# Altium PCB H18-002.pcbdoc
Units mm, origin at the board's own origin, x right, y up, seen from the top; angles counter-clockwise.
Board outline 36.9 x 34 mm, 4 copper layers (Top Layer, P1, L2, Bottom Layer), stack 0.704 mm thick; 110 components, 63 nets, 277 pads, 64 vias.
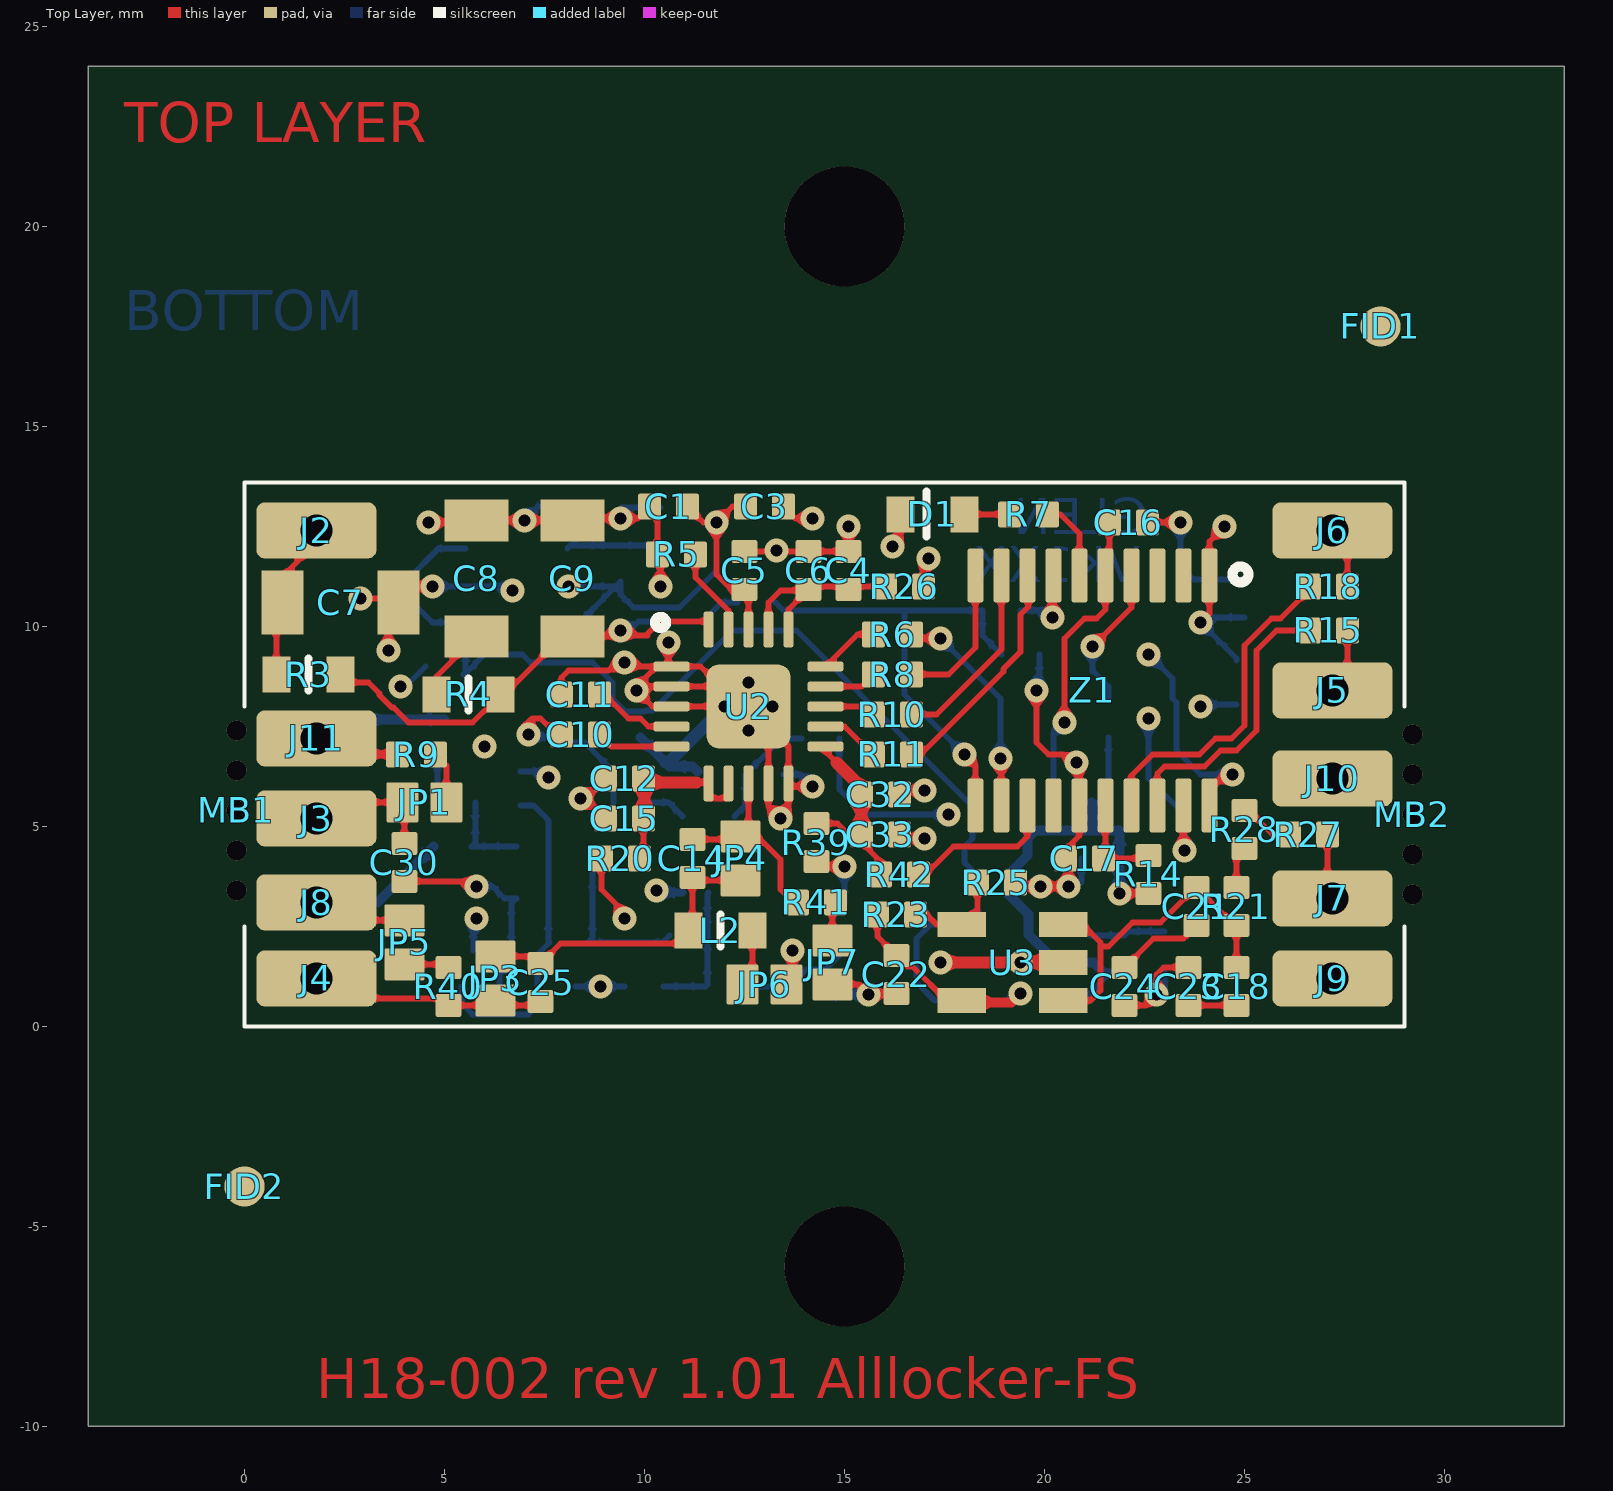
[diagram p0: Top Layer view]
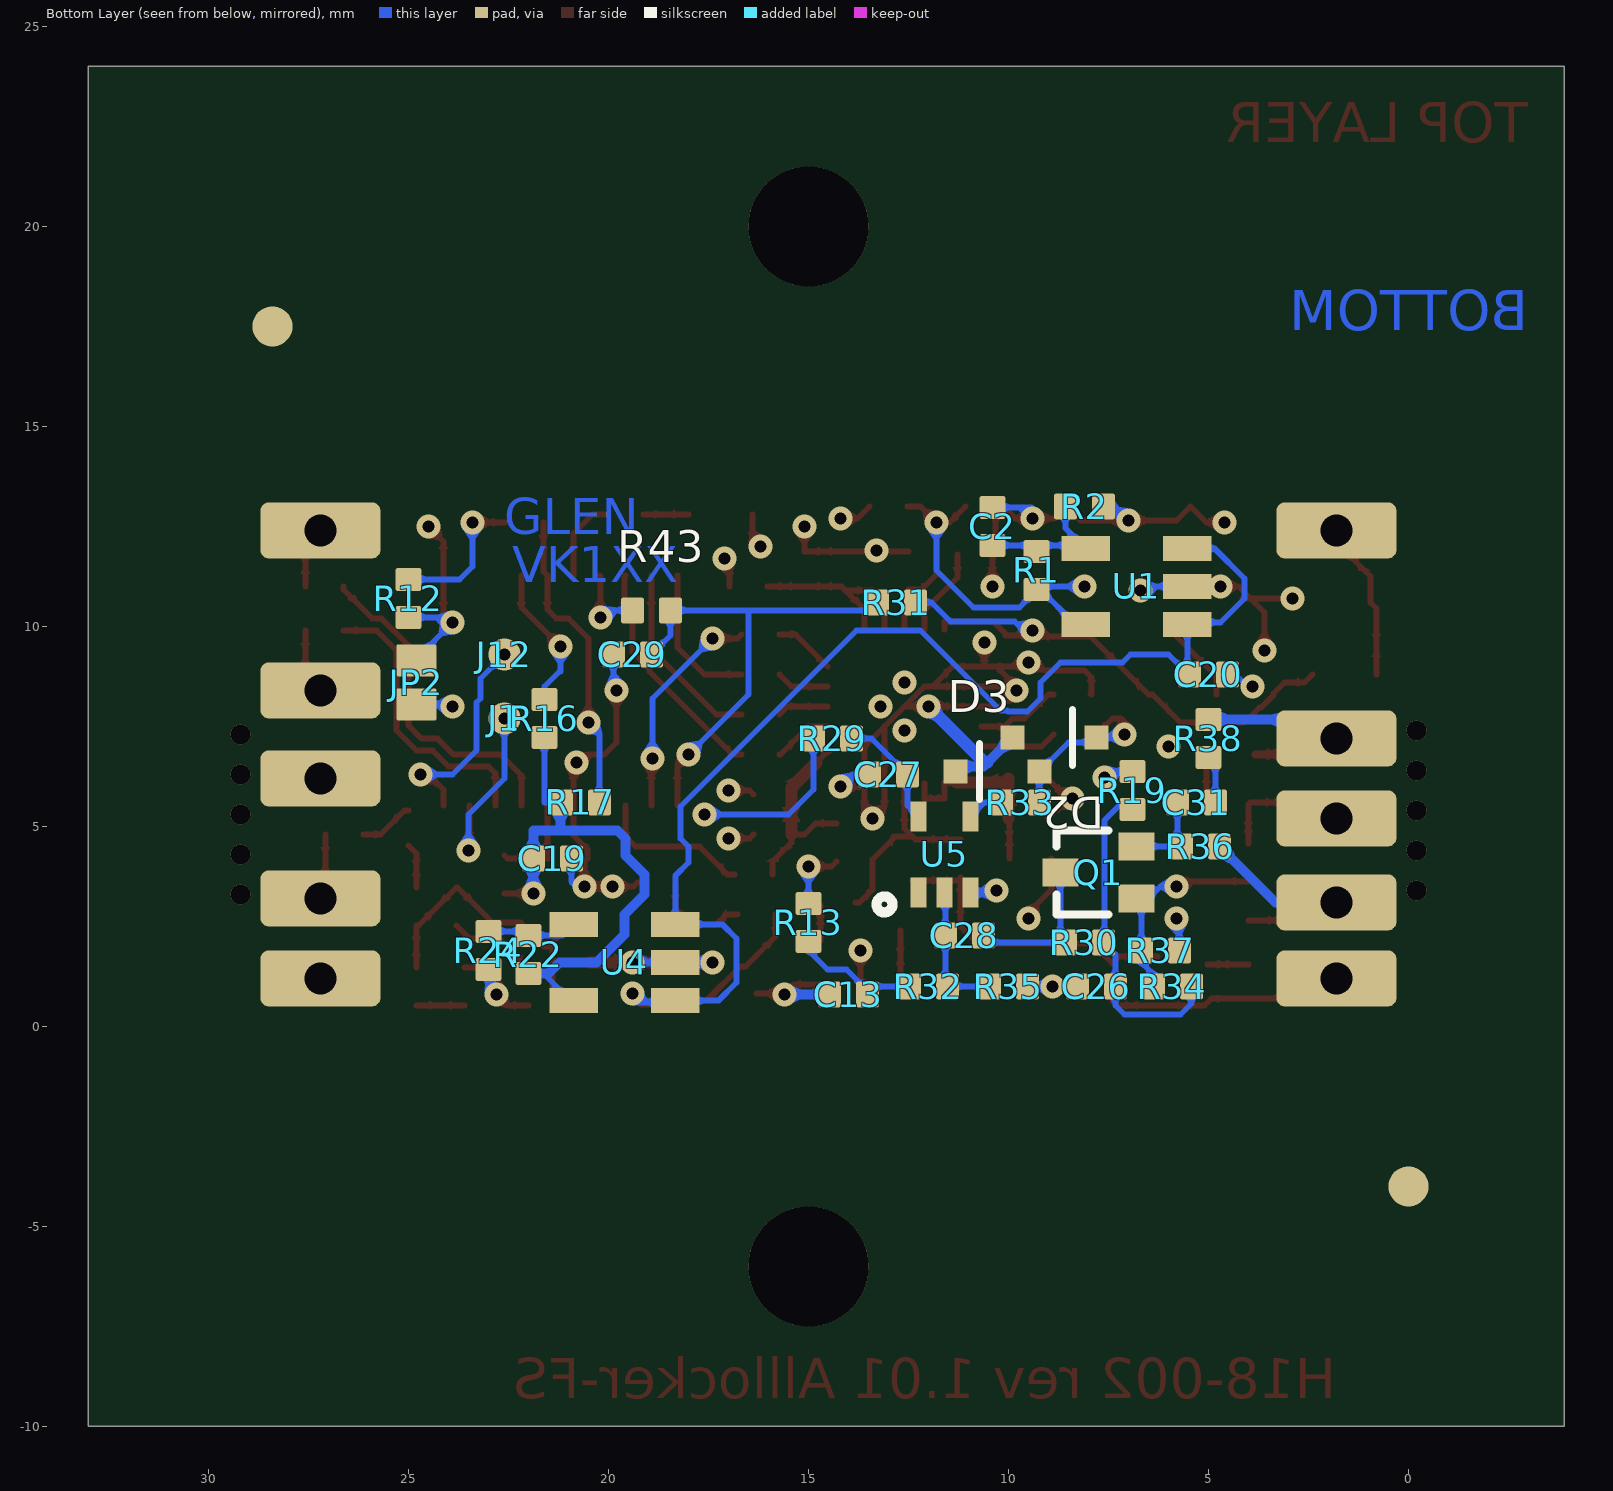
[diagram p1: Bottom Layer view, seen from below]
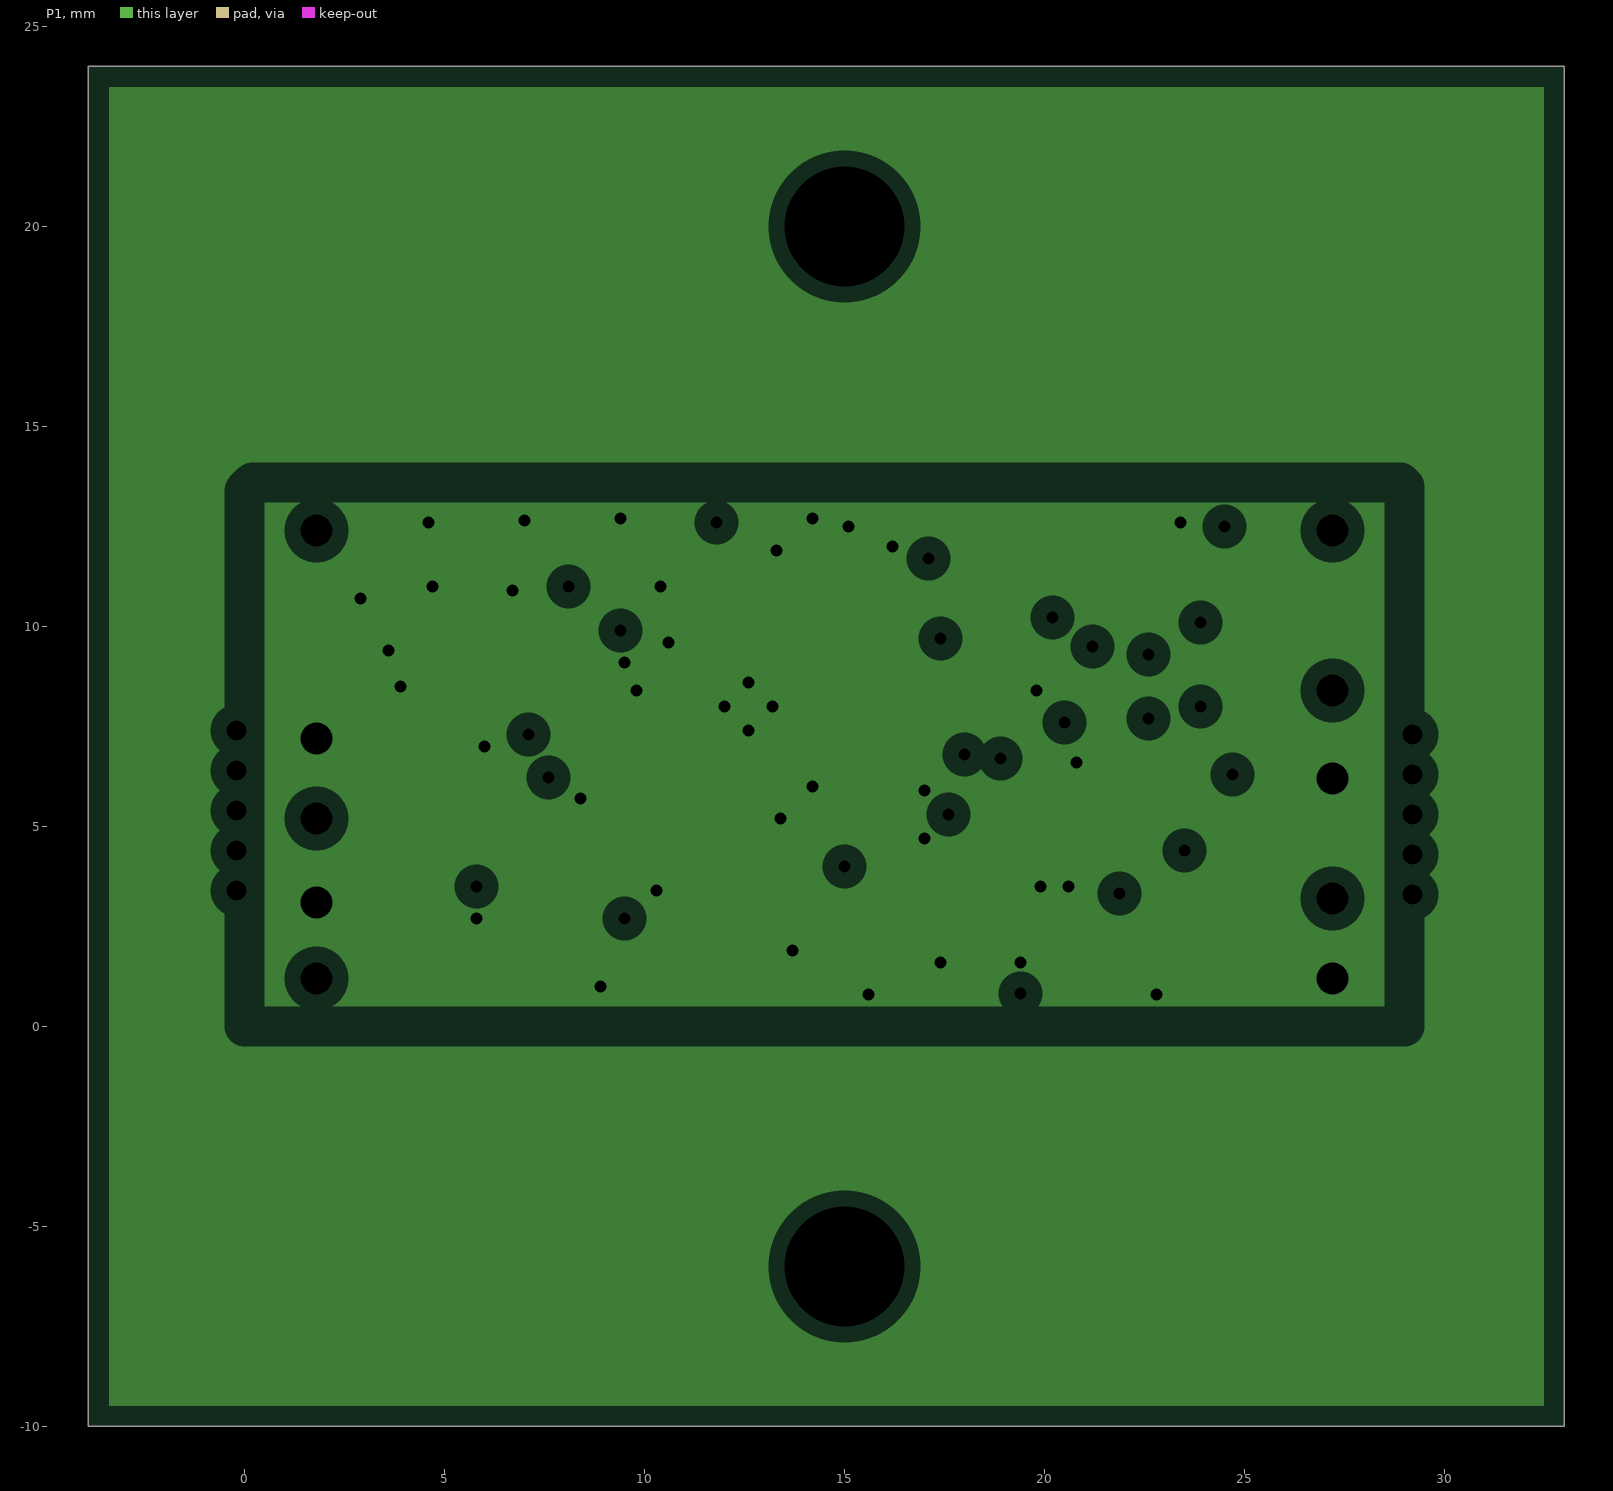
[diagram p2: P1, clearances drawn from the general rule]
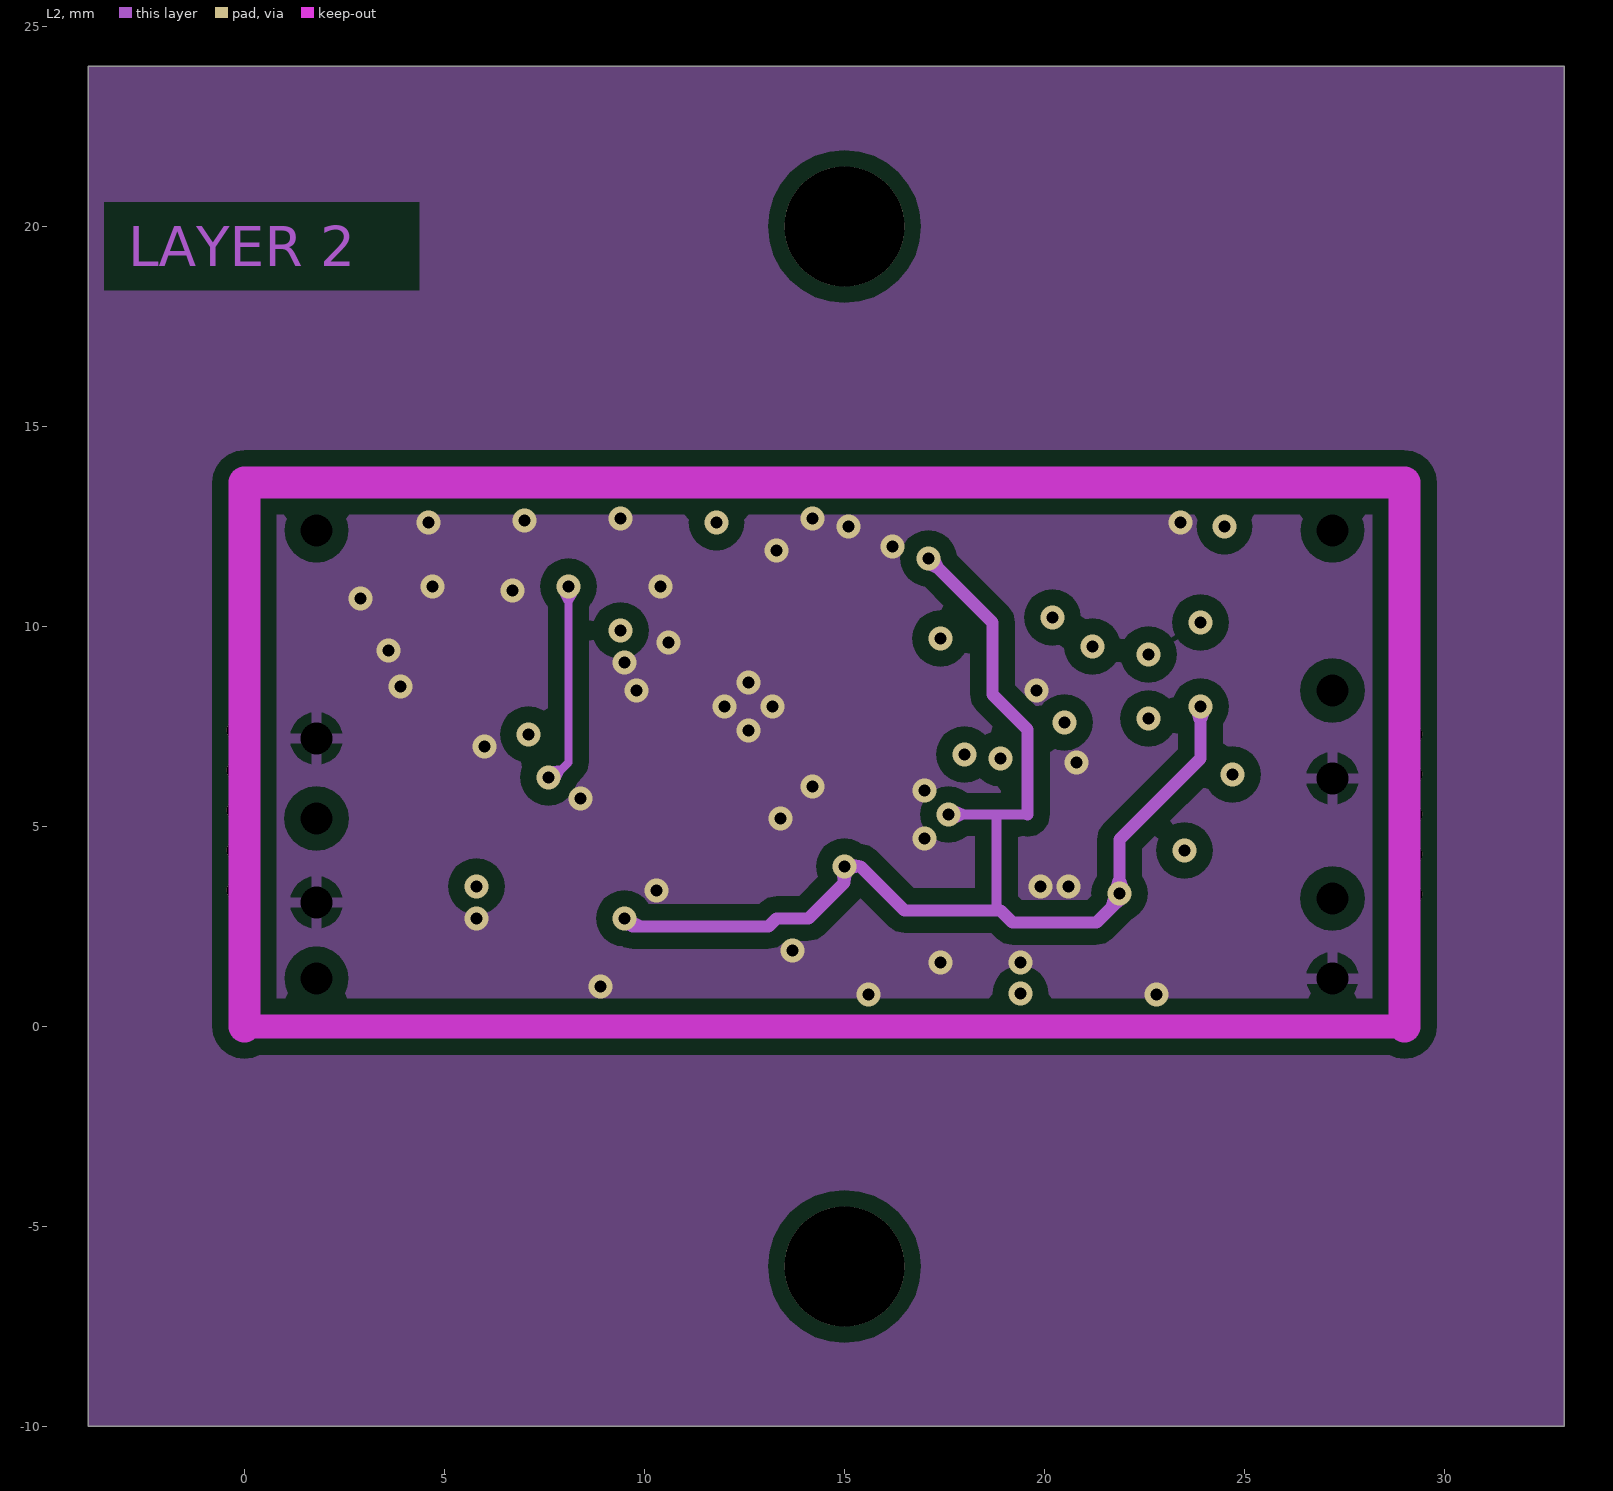
[diagram p3: L2]

## Layer stack, top to bottom
Top Solder: solder mask 0.0102, Solder Resist, Dk 3.5
Top Layer: signal copper 0.0356
Dielectric 1: core 0.18, FR-4, Dk 4.2
P1: plane copper 0.036, net GND
Dielectric 3: core 0.254, Dk 4.2
L2: signal copper 0.036
Dielectric 4: prepreg 0.127, Dk 4.2
Bottom Layer: signal copper 0.0356
Bottom Solder: solder mask 0.0102, Solder Resist, Dk 3.5

## Board outline
-3.9,-10 33,-10 33,24 -3.9,24

## Design rules (kind name [scope] priority, off if disabled: settings)
Clearance "Clearance Layer 2" [OnLayer('L2') vs HasFootprint('mousebite')] p1: gap=0 ignorepadtopadclearanceinfootprint=FALSE
Clearance "in poly" [InPolygon] p2: gap=0.4 ignorepadtopadclearanceinfootprint=FALSE
Clearance Clearance_1 [not InPolygon] p3: gap=0.15 ignorepadtopadclearanceinfootprint=FALSE except(0: Arc-Hole Track-Hole SMDPad-Hole THPad-Hole Via-Hole Fill-Hole Poly-Hole Region-Hole Text-Hole)
ComponentClearance [All] p1 off: gap=0.254 collisioncheckmode=3 verticalgap=0.254 showdistances=FALSE
DiffPairsRouting [All] p1: maxlimit=10 minlimit=0.2 mostfreqgap=0.2 toplayer_mingap=0.2 toplayer_minwidth=0.15 toplayer_maxwidth=0.2 toplayer_prefwidth=0.2 midlayer1_maxgap=0.2 midlayer1_minwidth=0.381 midlayer1_maxwidth=0.381 midlayer1_prefwidth=0.381 bottomlayer_mingap=0.2 bottomlayer_prefgap=0.2 bottomlayer_minwidth=0.15 bottomlayer_maxwidth=0.2 bottomlayer_prefwidth=0.2 maxuncoupledlength=100
Height [All] p1 off: minheight=0 maxheight=25.4 prefheight=12.7
HoleSize [All] p1: absolutevalues=TRUE maxlimit=5 minlimit=0.2 maxpercent=80.000 minpercent=20.000
MinimumAnnularRing [All] p1: minimumring=0.1
MinimumSolderMaskSliver SilkscreenOverComponentPads [All] p2: minsoldermaskwidth=0.254
PlaneClearance PlaneClearance_1 [All] p1: clearance=0.4
PlaneConnect PlaneConnectVia [IsVia] p1: planeconnectstyle=Direct reliefexpansion=0.508 reliefentries=4 reliefconductorwidth=0.254 reliefairgap=0.254
PlaneConnect PlaneConnectPin [IsComponentVia Or IsComponentPad] p2: planeconnectstyle=Relief reliefexpansion=0.508 reliefentries=4 reliefconductorwidth=0.254 reliefairgap=0.254
PolygonConnect PolygonConnectPad [IsComponentPad] p1: connectstyle=Relief reliefconductorwidth=0.254 reliefentries=4 polygonreliefangle="90 Angle" airgapwidth=0.254
PolygonConnect PolygonConnectvIA [IsVia] p2: connectstyle=Direct reliefconductorwidth=0.254 reliefentries=4 polygonreliefangle="90 Angle" airgapwidth=0.254
RoomDefinition main [InComponentClass('main')] p1: confinementstyle=ConfineIn formatcopy=TRUE lockcomponents=FALSE outline -45,-70 5.8,-70 5.8,-44.6 -45,-44.6
RoutingVias [All] p1: holewidth=0.3 width=0.6 viastyle="Through Hole" minholewidth=0.3 minwidth=0.6 maxholewidth=10 maxwidth=20
SilkToSolderMaskClearance [IsPad] p1: minsilkscreentomaskgap=0.05 clearancetoexposedcopper=FALSE
SolderMaskExpansion [All] p1: expansion=0.07
Width [All] p1: maxlimit=10 minlimit=0.15 preferedwidth=0.25 toplayer_prefwidth=0.2 midlayer1_minwidth=0.2 bottomlayer_prefwidth=0.2 minimp=50.000000 maximp=50.000000 favimp=50.000000
23 further rules are at their usual default settings.

## Components (designator, comment, footprint, x,y, rotation, side; value= is the part's Value field where it differs from the comment)
C1 "1u 10V" 0402C 10.6,13 r180 top
C2 "100p" 0402C 10.4,12.5 r90 bottom
C3 "100n" 0402C 13,13 r0 top
C4 "100n" 0402C 15.1,11.4 r90 top
C5 "100p" 0402C 12.5,11.4 r90 top
C6 "100p" 0402C 14.1,11.4 r90 top
C7 "15n NPO" 1206C 2.4,10.6 r0 top
C8 "1u 10V" 1206C 5.8,11.2 r90 top
C9 "68n NPO" 1206C 8.2,11.2 r90 top
C10 "1n" 0402C 8.4,7.3 r0 top
C11 "1n" 0402C 8.4,8.3 r180 top
C12 "100p" 0402C 9.5,6.2 r0 top
C13 "10n" 0402C 14,0.8 r180 bottom
C14 "470p" 0402C 11.2,4.2 r90 top
C15 "100n" 0402C 9.5,5.2 r0 top
C16 "10n" 0402C 22.1,12.6 r0 top
C17 "10n" 0402C 21,4.2 r180 top
C18 "1u 10V" 0402C 24.8,1 r270 top
C19 "1u 10V" 0402C 21.4,4.2 r180 bottom
C20 "1u 10V" 0402C 5,8.8 r180 bottom
C21 "1u 10V" 0402C 23.8,3 r270 top
C22 "1u 10V" 0402C 16.3,1.3 r270 top
C23 "1u 10V" 0402C 23.6,1 r90 top
C24 "1u 10V" 0402C 22,1 r270 top
C25 "470p" 0402C 7.4,1.1 r90 top
C26 "100n" 0402C 7.8,1 r180 bottom
C27 "10n" 0402C 13,6.3 r0 bottom
C28 "1n" 0402C 11.1,2.275 r0 bottom
C29 "10n" 0402C 19.4,9.3 r0 bottom
C30 "100p" 0402C 4,4.1 r270 top
C31 "1n" 0402C 5.3,5.6 r0 bottom
C32 "100p" 0402C 15.9,5.8 r0 top
C33 "100n" 0402C 15.9,4.8 r0 top
D1 "red" 0603LED 17.2,12.8 r180 top
D2 "1SS356" SOD323 9.9,7.225 r0 bottom
D3 "1SS356" SOD323 9.225,6.375 r180 bottom
FID1 "FIDUCIAL" FIDUCIAL 28.4,17.5 r0 top
FID2 "FIDUCIAL" FIDUCIAL 0,-4 r0 top
J1 "SWD" TESTPOINT_SMALL 22.6,7.7 r180 bottom
J2 "CTL" GPPAD3R#1 1.8,12.3 r0 top
J3 "RFIN" GPPAD3R#2 1.8,5.2 r0 top
J4 "PAD" GPPAD3R#2 1.8,1.2 r0 top
J5 "USBDP" GPPAD3R#2 27.2,8.4 r0 top
J6 "USBDM" GPPAD3R#3 27.2,12.5 r0 top
J7 "INV" GPPAD3R#2 27.2,3.2 r0 top
J8 "GND" GPPAD3R#2 1.8,3.1 r0 top
J9 "GND" GPPAD3R#2 27.2,1.2 r0 top
J10 "GND" GPPAD3R#2 27.2,6.2 r0 top
J11 "GND" GPPAD3R#2 1.8,7.2 r0 top
J12 "SWC" TESTPOINT_SMALL 22.6,9.3 r180 bottom
JP1 "blob" BLOBJUMPER#1 4.5,5.6 r0 top
JP2 "blob" BLOBJUMPER#2 24.8,8.6 r90 bottom
JP3 "blob" BLOBJUMPER#1 6.275,1.2 r90 top
JP4 "blob" BLOBJUMPER#1 12.4,4.2 r270 top
JP5 "blob" BLOBJUMPER#1 4,2.1 r90 top
JP6 "blob" BLOBJUMPER#1 13,1.05 r0 top
JP7 "blob" BLOBJUMPER#1 14.7,1.6 r270 top
L2 "820n" 0603L 11.9,2.4 r180 top
MB1 "mousebite" mousebite -0.2,5.4 r90 top
MB2 "mousebite" mousebite 29.2,5.3 r90 top
Q1 "NPN1-SOT-23" SOT-323 6.8,3.2 r90 bottom
R1 "150k" 0402R 9.3,11.4 r270 bottom
R2 "47k" 0402R 8.1,13 r180 bottom
R3 "10k" 0603R 1.6,8.8 r180 top
R4 "47k" 0603R 5.6,8.3 r180 top
R5 "5k1" 0402R 10.8,11.8 r180 top
R6 "51" 0402R 16.2,9.8 r180 top
R7 "1k" 0402R 19.6,12.8 r0 top
R8 "1k" 0402R 16.2,8.8 r180 top
R9 "51" 0402R 4.3,6.8 r180 top
R10 "1k" 0402R 16.2,7.8 r180 top
R11 "1k" 0402R 16.2,6.8 r180 top
R12 "4k7" 0402R 25,10.7 r90 bottom
R13 "51" 0402R 15,2.6 r270 bottom
R14 "10" 0402R 22.6,3.8 r90 top
R15 "22" 0402R 27.1,9.9 r180 top
R16 "47k" 0402R 21.6,7.7 r90 bottom
R17 "10" 0402R 20.7,5.6 r180 bottom
R18 "22" 0402R 27.1,11 r180 top
R19 "51" 0402R 6.9,5.9 r270 bottom
R20 "10" 0402R 9.4,4.2 r0 top
R21 "51" 0402R 24.8,3 r90 top
R22 "62k" 0402R 22,1.8 r270 bottom
R23 "220k" 0402R 16.3,2.8 r180 top
R24 "47k" 0402R 23,1.9 r270 bottom
R25 "47k" 0402R 18.8,3.6 r0 top
R26 "10" 0402R 16.5,11 r180 top
R27 "51" 0402R 26.6,4.8 r0 top
R28 "51" 0402R 25,4.925 r90 top
R29 "51" 0402R 14.4,7.2 r180 bottom
R30 "470" 0402R 8.1,2.1 r180 bottom
R31 "47k" 0402R 12.8,10.6 r180 bottom
R32 "22k" 0402R 12,1 r180 bottom
R33 "220" 0402R 9.7,5.6 r180 bottom
R34 "47k" 0402R 5.9,1 r180 bottom
R35 "22k" 0402R 10,1 r180 bottom
R36 "270" 0402R 5.2,4.5 r0 bottom
R37 "22k" 0402R 6.2,1.9 r180 bottom
R38 "10" 0402R 5,7.2 r90 bottom
R39 "10" 0402R 14.3,4.6 r90 top
R40 "51" 0402R 5.1,1 r90 top
R41 "470" 0402R 14.3,3.1 r0 top
R42 "1k" 0402R 16.375,3.8 r180 top
R43 "10k" 0402R 18.925,10.4 r180 bottom
U1 "MIC5207BM5" SOT23-5 6.8,11 r270 bottom
U2 "ADF4153ALFSCP" ADI-CP-20-6 12.6,8 r0 top locked
U3 "MIC5207BM5" SOT23-5 19.2,1.6 r270 top
U4 "MIC5207BM5" SOT23-5 19.6,1.6 r270 bottom
U5 "7SZ14" SC70-5 11.6,4.3 r90 bottom
Z1 "STM32F042F4P6" TSSOP20_4.4MM 21.2,8.4 r270 top locked

## Footprints (in the part's own frame and the unit in brackets; to place one, negate y for a bottom-side part, rotate by r counter-clockwise, add the part's x,y. Pads: shape width x height; smd on the part's side, far side on the other; paste and mask are expansions set on the pad)
0402C [mm]
  rrect20% 0.575x0.65 smd: 1(-0.475,0) 2(0.475,0)
  body extent -0.53,-0.28 0.53,0.28, height 0.5
0402R [mm]
  rrect20% 0.575x0.65 smd: 1(-0.475,0) 2(0.475,0)
  body extent -0.53,-0.28 0.53,0.28, height 0.5
0603L [mm] "0603 inductor"
  rect 0.7x0.9 smd: 1(-0.8,0) 2(0.8,0)
  silkscreen extent 0,-0.4 0,0.4, body extent -0.85,-0.45 0.85,0.45, height 1
0603LED [mm]
  rect 0.7x0.9 smd: A(-0.8,0) K(0.8,0)
  silkscreen extent 0.15,-0.58 0.15,0.55, body extent -0.9,-0.45 0.9,0.45, height 0.6
0603R [mm] "0603resistor"
  rect 0.7x0.9 smd: 1(-0.8,0) 2(0.8,0)
  silkscreen extent 0,-0.4 0,0.4, body extent -0.85,-0.45 0.85,0.45, height 1
1206C [mm]
  rect 1.05x1.6 smd: 1(-1.45,0) 2(1.45,0)
  body extent -1.6,-0.8 1.6,0.8, height 0.55
ADI-CP-20-6 [mm] "adi lfcsp"
  rrect30% 2.1x2.1 smd paste-1 mask+0.07: 0(0,0)
  rrect50% 0.9x0.25 smd mask+0.07: 1(-1.925,1) 2(-1.925,0.5) 3(-1.925,0) 4(-1.925,-0.5) 5(-1.925,-1) 11(1.925,-1) 12(1.925,-0.5) 13(1.925,0) 14(1.925,0.5) 15(1.925,1)
  rrect50% 0.25x0.9 smd mask+0.07: 6(-1,-1.925) 7(-0.5,-1.925) 8(0,-1.925) 9(0.5,-1.925) 10(1,-1.925) 16(1,1.925) 17(0.5,1.925) 18(0,1.925) 19(-0.5,1.925) 20(-1,1.925)
  rrect30% 0.8x0.8 on Top Paste: ""(-0.5,-0.5) ""(-0.5,0.5) ""(0.5,-0.5) ""(0.5,0.5)
  silkscreen extent -2.34,1.96 -2.06,2.24, body extent -2,-2 2,2, height 0.8
BLOBJUMPER#1 [mm] "blob  jumper"
  rrect10% 0.8x1 smd paste-0.5: 1(-0.55,0) 2(0.55,0)
  oct 0.8x1 on Top Solder paste-1 mask-1: 3(0,0)
BLOBJUMPER#2 [mm] "blob  jumper"
  rrect10% 0.8x1 smd paste-0.5: 1(-0.55,0) 2(0.55,0)
  oct 0.8x1 on Bottom Solder paste-1 mask-1: 3(0,0)
FIDUCIAL [mm] "PCB Fiducial marker"
  round 1 smd far side paste-1 mask+1: 0(0,0)
  round 1 smd paste-1 mask+1: 1(0,0)
GPPAD3R#1 [mm] "smaller GPpad"
  rrect30% 3x1.4 / inner rrect30% 0x0 / far side rrect30% 3x1.4 hole 0.8 paste-1 mask+0: 1(0,0.1)
GPPAD3R#2 [mm] "smaller GPpad"
  rrect30% 3x1.4 / inner rrect30% 0x0 / far side rrect30% 3x1.4 hole 0.8 paste-1 mask+0: 1(0,0)
GPPAD3R#3 [mm] "smaller GPpad"
  rrect30% 3x1.4 / inner rrect30% 0x0 / far side rrect30% 3x1.4 hole 0.8 paste-1 mask+0: 1(0,-0.1)
mousebite [mm] "mousebite"
  round 0.5 hole 0.5 unplated: ""(-2,0) ""(-1,0) ""(0,0) ""(1,0) ""(2,0)
SC70-5 [mm]
  rect 0.75x0.4 smd: 1(-0.955,0.65) 2(-0.955,0) 3(-0.955,-0.65) 4(0.955,-0.65) 5(0.955,0.65)
  silkscreen extent -1.45,1.3 -1.05,1.7, body extent -0.71,-1.1 0.79,1.1, height 1
SOD323 [mm] "SOD323 diode"
  rect 0.6x0.6 smd: A(0,0) K(-2.1,0)
  silkscreen extent -1.5,-0.7 -1.5,0.7
SOT23-5 [mm]
  rect 0.62x1.22 smd: 1(0.953,1.27) 2(0,1.27) 3(-0.952,1.27) 4(-0.953,-1.27) 5(0.952,-1.27)
  body extent -1.25,-0.88 1.25,0.87, height 1.5
SOT-323 [mm]
  rect 0.7x0.9 smd: 1(0,0) 2(1.3,0) 3(0.65,1.9)
  silkscreen extent -0.4,0.7 1.7,2
TESTPOINT_SMALL [mm] "small tp"
  round 0.8 smd paste-0.5: 1(0,0)
TSSOP20_4.4MM [mm] "TSSOP20 4.4mm"
  rrect30% 1.35x0.4 smd mask+0.07: 1(-2.875,2.925) 2(-2.875,2.275) 3(-2.875,1.625) 4(-2.875,0.975) 5(-2.875,0.325) 6(-2.875,-0.325) 7(-2.875,-0.975) 8(-2.875,-1.625) 9(-2.875,-2.275) 10(-2.875,-2.925) 11(2.875,-2.925) 12(2.875,-2.275) 13(2.875,-1.625) 14(2.875,-0.975) 15(2.875,-0.325) 16(2.875,0.325) 17(2.875,0.975) 18(2.875,1.625) 19(2.875,2.275) 20(2.875,2.925)
  silkscreen extent -3.1,3.5 -2.7,3.9, body extent -2.2,-3.4 2.2,3.4, height 1

## Part data
C1 C2 C3 C4 C5 C6 C7 C8 C9 C10 C11 C12 C14 C15 C18 C19 C20 C21 C22 C23 C24 C25 C28 C29 C30 C31 C32 C33: library part caps
C13 C16 C17 C26 C27: library part casp
D1: library part LEDS
D2 D3: library part DIODE-AKPINS_SMALL, "diode small"
FID1 FID2: "fiducial mark"
J1 J2 J3 J4 J5 J6 J7 J8 J9 J10 J11 J12: library part TESTPOINT, "test point"
JP1 JP2 JP3 JP4 JP5 JP6 JP7: library part BLOBJUMPER, "blob jumper"
L2: library part INDSMALL, "inductor small"
R1 R2 R3 R4 R5 R6 R7 R8 R9 R10 R11 R12 R13 R14 R15 R16 R17 R18 R19 R20 R21 R22 R23 R24 R25 R26 R27 R28 R29 R30 R31 R32 R33 R34 R35 R36 R37 R38 R39 R40 R41 R42 R43: library part ress, "resistor small"
U1 U3 U4: "adjustable low dropout regulator"
U2: library part ADF4153LFSCP, "freq synthesiser"
U5: library part 7SZ04, "tinylogic unbuffer"
Z1: library part STM32F042x4, "STM32 M0 TSSOP"

## Free pads (board coordinates)
  round 3 hole 3 unplated: ""(15,-6) ""(15,20)

## Via types
v1: diameter 0.6, hole 0.3, Top Layer to Bottom Layer, tented both sides, 56 vias
v2: diameter 0.6, hole 0.3, Top Layer to Bottom Layer, 8 vias

## Nets (pads, with @x,y where several pads share a name; then routed paths per layer and width w, separated by ;. In a path a pad name is that pad's centre, name@x,y a point inside that pad or via, vN(x,y) a via of type N, cw(c..) or ccw(c..) an arc to the next point about the centre after c; other vN are vias at no path point)
7V: C20.1 C22.1 R23.2 U1.1 U1.3 U3.5 U4.1 U4.3 | length 35.5
  Top Layer w0.15: R23.2 15.825,2.25 C22.1 16.575,1.5 16.7,1.5 17.552,0.647 U3.5 U3.5@17.978,0.6
  Top Layer w0.25: U3.5@17.978,0.6 19.175,0.6 v1(19.4,0.825)
  Bottom Layer w0.15: U1.3 4.852,11.953 4.1,11.2 4.1,10.7 4.7,10.1 5.477,10.1 U1.1 ; U1.1@5.753,10.048 U1.1 ; v1@19.4,0.6 18.377,0.6 U4.1 17.253,0.647 16.8,1.1 16.8,2.2 17.152,2.552 U4.3 18.33,3.77 18,4.1 18,4.5 18.2,4.7 18.2,5.5 13.8,9.9 12.2,9.9 10.2,7.9 10.042,7.9 10.017,7.875 9.525,7.875 9.2,8.2 9.2,8.6 8.7,9.1 7.15,9.1 6.95,9.3 6,9.3 5.5,8.8 C20.1 5.53,8.855 U1.1
10M: C25.1 J4.1 JP3.1 R40.1 | length 5.8
  Top Layer w0.15: J4.1@1.8,1 2.1,0.7 4.925,0.7 R40.1 7.3,0.525 C25.1
AC: C29.1 R31.1 R43.2 Z1.11 | length 12.2
  Top Layer w0.15: v1(18,6.8) 18.275,6.525 Z1.11
  Bottom Layer w0.15: R31.1 13.475,10.4 16.5,10.4 ; v1(18,6.8) 16.5,8.3 16.5,10.4 ; C29.1 18.45,9.775 R43.2 16.5,10.4
CE: R42.1 Z1.13 | length 3.9
  Top Layer w0.15: R42.1 17.025,3.8 17.725,4.5 19.325,4.5 19.575,4.75 Z1.13
CK: R11.1 Z1.8 | length 5.8
  Top Layer w0.15: R11.1 16.9,6.8 18.975,8.875 18.975,8.942 19.4,9.366 19.4,10.3 19.6,10.5 19.6,11.25 Z1.8
CP: C9.1 R3.1 R4.1 R31.2 U2.20 | length 14.3
  Top Layer w0.15: R3.1 2.6,8.6 3.1,8.6 3.375,8.325 3.375,8.283 3.683,7.975 3.725,7.975 4.1,7.6 5.7,7.6 R4.1 6.5,8.3 7.95,9.75 C9.1 ; C9.1@8.225,9.775 C9.1 ; U2.20 11.6,10.125 10.383,10.125 10.075,9.817 10.075,9.775 9.525,9.775 v1(9.4,9.9) 9.25,9.75 C9.1
  Bottom Layer w0.15: v1(9.4,9.9) 9.625,9.9 9.85,10.125 11.45,10.125 11.925,10.6 R31.2
CTL: C7.1 J2.1 R3.2 | length 4.4
  Top Layer w0.15: R3.2 0.8,10.45 C7.1 0.95,11.25 2,12.3 2,12.4 J2.1@1.8,12.6
D: R10.1 Z1.9 | length 4.8
  Top Layer w0.15: R10.1 17.3,7.8 18.925,9.425 Z1.9
DC: C10.1 D2.K D3.A R33.2 | length 4.6
  Top Layer w0.15: v1(7.1,7.3) 7.1,7.6 7.2,7.7 7.4,7.7 7.8,7.3 C10.1
  Bottom Layer w0.15: v1(7.1,7.3) 7.175,7.225 D2.K 7.925,7.1 8.5,7.1 D3.A R33.2
DM: J6.1 R18.1 | length 1.7
  Top Layer w0.15: J6.1@27.2,12.5 27.575,12.125 R18.1
DP: J5.1 R15.1 | length 1.7
  Top Layer w0.15: J5.1 27.575,8.775 R15.1
GND: C1.2 C2.2 C3.2 C4.2 C5.2 C6.2 C7.2 C8.2 C9.2 C11.2 C12.1 C13.1 C15.1 C16.2 C17.2 C19.2 C20.2 C22.2 C23.2 C24.2 C26.1 C27.2 C29.2 C32.2 C33.2 D1.K D2.A D3.K J8.1 J9.1 J10.1 J11.1 JP5.2 JP6.2 JP7.2 R2.2 R5.2 R9.2 R12.2 R24.2 R25.2 R35.2 R36.1 R37.2 R38.2 U1.2 U2.0 U2.1 U2.2 U2.3 U2.9 U2.10 U3.2 U4.2 U5.3 Z1.15 | length 87
  Top Layer w0.15: J8.1 2.25,2.65 JP5.2 ; v1(2.9,10.7) C7.2@3.95,10.7 ; v1(3.6,9.4) 3.6,10.35 C7.2 C7.2@3.95,10.7 ; C7.2@4.15,10.7 C7.2@3.95,10.7 ; v1(4.6,12.6) 5.05,12.6 5.45,13 C8.2 v1(7,12.65) C9.2 8.55,13 8.85,12.7 v1(9.4,12.7) 9.825,12.7 C1.2 10.325,12.8 R5.2 10.4,11.725 v1(10.4,11) ; v1(4.7,11) 4.25,11 C7.2@3.95,10.7 ; v1(5.8,2.7) v1@5.825,2.725 ; C11.2@7.95,8.325 C11.2 7.925,8.725 8.1,8.9 9.1,8.9 9.3,9.1 v1(9.5,9.1) 9.6,9 U2.1@10.3,9 ; v1(8.4,5.7) v1@8.525,5.7 ; C15.1 v1@8.525,5.7 ; C12.1 v1@8.525,5.7 ; v1(10.6,9.6) 10.6,9.075 U2.1 ; C5.2 C6.2 C4.2 v1(15.1,12.5) v1@15.1,12.7 ; C3.2 13.775,12.7 v1(14.2,12.7) ; JP6.2 13.7,1.2 v1(13.7,1.9) ; v1(14.2,6) 13.675,6 U2.10 ; JP7.2 15.35,1.05 v1(15.6,0.8) 15.625,0.825 C22.2 ; v1(16.2,12) 16.4,12.2 D1.K ; C33.2 16.475,4.7 v1(17,4.7) ; C32.2 16.475,5.9 v1(17,5.9) ; R25.2 19.375,3.5 v1(19.9,3.5) v1(20.6,3.5) 20.6,4.125 C17.2 20.525,4.425 20.875,4.775 Z1.15 20.875,6.525 v1(20.8,6.6) 20.67,6.6 20.47,6.8 20.1,6.8 19.8,7.1 v1(19.8,8.4) ; C24.2 22.525,0.525 v1(22.8,0.8) 22.8,1.3 22.975,1.475 C23.2 ; C16.2 v1(23.4,12.6) ; v1(9.8,8.4) 9.8,8.5 U2.1@10.3,9 ; v1(9.8,8.4) 10.2,8 U2.3 v1(12,8) U2.0 ; v1(9.8,8.4) 9.9,8.5 U2.2 U2.0@11.9,8.5 ; U2.1@10.3,9 U2.1 ; U2.1 11.4,9 U2.0@11.9,8.5 ; U2.0@11.9,8.5 12.1,8.5 U2.0 ; U2.0 U2.0@13.1,7.5 ; U2.0@13.1,7.5 13.6,7 U2.10 ; U2.0@13.1,7.5 U2.9 13.1,5.5 v1(13.4,5.2) 13.6,5.4 U2.10
  Top Layer w0.2: J11.1 2.2,6.8 R9.2
  Top Layer w0.3: v1(17.4,1.6) v1(19.4,1.6) U3.2
  Bottom Layer w0.15: v1@2.875,10.675 v1(2.9,10.7) ; v2(3.9,8.5) 4.025,8.5 C20.2@4.525,9 ; v1(4.7,11) U1.2 v1@6.5,11 ; R37.2 5.725,2.625 v1(5.8,2.7) ; v1(7,12.65) 7.35,13 R2.2 ; C26.1 v1(8.9,1) R35.2@9.5,1 ; v1(9.4,12.7) 9.4,12.95 9.425,12.975 C2.2 ; v1(10.6,9.6) v1@10.8,9.6 ; C27.2 13.9,6.3 v1(14.2,6) ; v1(17.4,1.6) U4.2 v1(19.4,1.6) ; v1(19.8,8.4) 19.875,8.475 C29.2 ; v1(20.6,3.5) 20.8,3.5 20.925,3.625 C19.2 ; v1(20.8,6.6) v1@20.825,6.575 ; v1(22.8,0.8) 23,1 R24.2 ; v1(23.4,12.6) 23.4,11.5 23.725,11.175 R12.2
  Bottom Layer w0.2: v1(10.3,3.4) 10.355,3.345 U5.3
  Bottom Layer w0.25: J8.1 3.325,3.1 R36.1 ; J11.1 2.275,7.675 R38.2 ; D2.A 10.525,6.6 10.625,6.5 11.2,6.5 D3.K ; C13.1 v1(15.6,0.8)
  Bottom Layer w0.3: 10.525,6.6 10.6,6.6 v1(12,8)
  other v1: 6,7 12.6,7.4 13.2,8 12.6,8.6 6.7,10.9 13.3,11.9
INA: C10.2 U2.5 | length 1.9
  Top Layer w0.15: C10.2 9.175,7 U2.5
INB: C11.1 U2.4 | length 2.1
  Top Layer w0.15: C11.1 9,8.3 9.6,7.7 9.9,7.7 10.1,7.5 U2.4
INV: C28.2 R32.2 R35.1 U5.2 | length 3.4
  Bottom Layer w0.15: R35.1 R32.2 11.575,1.05 C28.2 11.575,3.32 U5.2
LE: R8.1 Z1.10 | length 3.7
  Top Layer w0.15: R8.1 17.6,8.8 18.275,9.475 Z1.10
LED0: R7.2 Z1.6 | length 2
  Top Layer w0.15: R7.2 20.4,12.8 20.875,12.325 Z1.6
MUX: R6.1 Z1.12 | length 5.6
  Top Layer w0.15: R6.1 16.775,9.7 v2(17.4,9.7) ; v1(18.9,6.7) 18.925,6.675 Z1.12
  Bottom Layer w0.15: v2(17.4,9.7) 18.9,8.2 v1(18.9,6.7)
NetC2_1: C2.1 R1.1 R2.1 U1.4 | length 3.5
  Bottom Layer w0.15: U1.4 U1.4@8.142,12.025 ; R2.1 8.575,12.458 U1.4@8.142,12.025 ; C2.1 U1.4@8.142,12.025
NetC4_1: C4.1 C6.1 R26.2 U2.16 U2.17 | length 4.9
  Top Layer w0.15: U2.17 13.1,10.6 13.4,10.9 C6.1@14.075,10.9 ; U2.16 13.6,10.425 C6.1@14.075,10.9 ; R26.2 14.175,11 C6.1 C6.1@14.075,10.9
NetC8_1: C8.1 R4.2 | length 1.9
  Top Layer w0.15: R4.2 4.8,8.75 C8.1
NetC12_2: C12.2 C15.2 R20.2 U2.6 U2.7 | length 4.9
  Top Layer w0.15: R20.2@9.975,4.2 C15.2 ; 11.3,6.1 11.6,6.1 11.6,5.7 12.1,5.7 U2.7
  Top Layer w0.3: C15.2@10,5.2 10,6.2 10.1,6.1 11.3,6.1
NetC13_2: C13.2 R13.2 R32.1 | length 3.3
  Bottom Layer w0.15: R32.1 13.325,1 C13.2 13.525,0.9 14.05,1.425 14.525,1.425 15,1.9 R13.2
NetC14_1: C14.1 C25.2 JP3.2 JP4.2 L2.2 | length 7.8
  Top Layer w0.15: JP3.2 7.225,1.75 C25.2 7.9,2.075 10.775,2.075 L2.2 11.2,2.5 C14.1 11.275,3.65 JP4.2
NetC16_1: C16.1 R17.2 Z1.5 | length 7.9
  Top Layer w0.15: v1(20.5,7.6) 20.5,9.7 21,10.2 21.3,10.2 21.525,10.425 Z1.5 21.625,11.375 C16.1
  Bottom Layer w0.15: R17.2 20.225,7.325 v1(20.5,7.6) v1@20.5,7.5
NetC17_1: C17.1 R14.2 Z1.16 | length 2.5
  Top Layer w0.15: Z1.16 21.525,4.25 C17.1 22.525,4.2 R14.2
NetC18_2: C18.2 C23.1 | length 1.2
  Top Layer w0.15: C23.1 C18.2
NetC21_2: C21.2 C24.1 | length 2.2
  Top Layer w0.15: C24.1 22.725,2.2 23.475,2.2 C21.2
NetC26_2: C26.2 R19.2 R30.2 R34.2 | length 8.1
  Bottom Layer w0.15: R34.2 5.425,0.575 5.7,0.3 7.1,0.3 7.325,0.525 C26.2 7.325,1.8 R30.2 7.6,2.125 7.6,5.155 7.23,5.525 R19.2@6.9,5.525
NetC27_1: C27.1 R29.2 U5.5 | length 2.9
  Bottom Layer w0.15: U5.5 12.525,5.53 C27.1 13.425,7.2 R29.2
NetC28_1: C28.1 Q1.3 R30.1 | length 3.9
  Bottom Layer w0.15: Q1.3 8.7,2.225 R30.1 10.45,2.1 C28.1
NetC30_2: C30.2 Q1.1 R34.1 R37.1 | length 5.4
  Top Layer w0.15: C30.2 5.675,3.625 v1(5.8,3.5)
  Bottom Layer w0.15: v1(5.8,3.5) 6.2,3.5 6.5,3.2 Q1.1 6.675,3.075 R37.1 6.675,1.6 6.375,1.3 R34.1
NetC31_1: C31.1 R38.1 | length 1.2
  Bottom Layer w0.15: C31.1 4.825,6.55 R38.1
NetC31_2: C31.2 Q1.2 R36.2 | length 2.3
  Bottom Layer w0.15: C31.2 5.775,4.6 R36.2 Q1.2
NetC32_1: C32.1 C33.1 R39.2 R42.2 U2.11 | length 5
  Top Layer w0.15: R39.2 14.825,5.075 15.1,4.8 C33.1 15.425,4.6 15.9,4.125 R42.2 ; U2.11 14.525,6.875 14.8,6.6
  Top Layer w0.3: 14.8,6.6 15.425,5.975 C32.1 C33.1
NetD1_A: D1.A R7.1 | length 1.1
  Top Layer w0.15: D1.A R7.1
NetJP1_2: JP1.2 R9.1 | length 1.3
  Top Layer w0.15: R9.1 5.05,6.525 JP1.2
NetJP2_2: JP2.2 R12.1 Z1.1 | length 5.1
  Top Layer w0.15: v1(23.9,10.1) 24.125,10.325 Z1.1 24.125,12.125 v2(24.5,12.5)
  Bottom Layer w0.15: JP2.2 24.8,9.2 v1(23.9,10.1) 24.025,10.225 R12.1
NetJP5_1: JP5.1 R40.2 | length 1
  Top Layer w0.15: JP5.1 R40.2@5.025,1.55
NetJP6_1: JP6.1 L2.1 | length 1.5
  Top Layer w0.15: JP6.1 12.7,1.3 L2.1
NetJP7_1: JP7.1 R41.2 | length 1
  Top Layer w0.15: JP7.1 14.7,3.025 R41.2
NetR6_2: R6.2 U2.15 | length 1.5
  Top Layer w0.15: U2.15 15.325,9.8 R6.2
NetR8_2: R8.2 U2.14 | length 1.3
  Top Layer w0.15: U2.14 15.425,8.5 R8.2
NetR10_2: R10.2 U2.13 | length 1.3
  Top Layer w0.15: U2.13 15.525,8 R10.2
NetR11_2: R11.2 U2.12 | length 1.5
  Top Layer w0.15: U2.12 15,7.5 15.7,6.8 R11.2
NetR15_2: R15.2 Z1.18 | length 7.3
  Top Layer w0.15: Z1.18 22.825,6.325 23,6.5 24,6.5 24.4,6.9 24.8,6.9 25.3,7.4 25.3,9.4 25.8,9.9 R15.2
NetR18_2: R18.2 Z1.17 | length 8.4
  Top Layer w0.15: Z1.17 22.175,6.275 22.7,6.8 23.876,6.8 24.276,7.2 24.676,7.2 25,7.524 25,9.524 25.676,10.2 25.9,10.2 26.625,10.925 R18.2
NetR21_2: R21.2 R28.1 | length 1.1
  Top Layer w0.15: R21.2 24.8,4.325 R28.1@25,4.525
NetR22_1: R22.1 R24.1 U4.4 | length 2.3
  Bottom Layer w0.15: U4.4 21.147,2.275 R22.1 22.1,2.375 R24.1
NetR23_1: R23.1 R25.1 U3.4 | length 2.5
  Top Layer w0.15: R23.1 17.05,2.8 17.298,2.552 U3.4 18.325,2.947 R25.1
NetR27_1: R27.1 R28.2 | length 1.4
  Top Layer w0.15: R28.2 25.1,5.4 25.7,4.8 R27.1
NetR33_1: R33.1 U5.4 | length 0.9
  Bottom Layer w0.15: R33.1 10.605,5.6 U5.4
NRST: R16.2 Z1.4 | length 3.7
  Top Layer w0.15: v2(21.2,9.5) 22.175,10.475 Z1.4
  Bottom Layer w0.15: v2(21.2,9.5) 21.2,8.875 21.225,8.875 21.6,8.5 R16.2
PWM: R43.1 Z1.7 | length 2
  Top Layer w0.15: v1(20.2,10.225) 20.2,11.25 Z1.7
  Bottom Layer w0.15: R43.1 20.025,10.4 v1(20.2,10.225) v1@20.175,10.2
REF: C14.2 JP4.1 R41.1 U2.8 | length 5.2
  Top Layer w0.15: C14.2 12.325,4.675 JP4.1 ; U2.8 12.6,4.95 JP4.1 ; R41.1 13.725,3.1 13.4,3.425 13.4,4.175 12.825,4.75 JP4.1
RFIN: C30.1 J3.1 JP1.1 | length 3.4
  Top Layer w0.15: J3.1 2.2,5.6 JP1.1 4,5.55 C30.1
RS: R5.1 U2.19 | length 2.2
  Top Layer w0.15: R5.1 11.275,11.225 12.1,10.4 U2.19
SWC: J12.1 Z1.20 | length 5.5
  Top Layer w0.15: Z1.20 24.125,5.925 24.5,6.3 v2(24.7,6.3)
  Bottom Layer w0.15: v2(22.6,9.3) 23.2,8.7 23.2,8.2 23.3,8.1 23.3,6.9 23.9,6.3 v2(24.7,6.3)
SWD: J1.1 Z1.19 | length 4.8
  Top Layer w0.15: Z1.19 23.475,4.425 v2(23.5,4.4)
  Bottom Layer w0.15: v2(22.6,7.7) 22.6,6.2 23.5,5.3 v2(23.5,4.4)
V: J7.1 R27.2 | length 1.7
  Top Layer w0.15: R27.2 27.075,3.325 J7.1
VDD: C19.1 JP2.1 R13.1 R14.1 R16.1 R17.1 R20.1 R22.2 R26.1 R29.1 R39.1 U4.5 | length 55.4
  Top Layer w0.15: R20.1 8.925,3.425 9.5,2.85 v1(9.5,2.7) ; R39.1 14.425,4 v1(15,4) ; R26.1 16.975,11.575 v1(17.1,11.7) ; v1@21.9,3.3 21.925,3.325 R14.1
  L2 w0.25: v1(17.6,5.3) 18.8,5.3 ; 18.9,2.9 18.8,3 18.8,5.3 ; 19.575,5.3 18.8,5.3
  L2 w0.3: v1(9.5,2.7) 9.7,2.5 13.1,2.5 13.3,2.7 14.1,2.7 15,3.6 v1(15,4) 15.4,4 16.5,2.9 18.9,2.9 19.2,2.6 21.3,2.6 21.875,3.175 v1(21.875,3.325) 21.875,4.675 23.9,6.7 v1(23.9,8) ; v1(17.1,11.7) 18.7,10.1 18.7,8.3 19.575,7.425 19.575,5.3
  Bottom Layer w0.15: v1@14.875,4.125 v1(15,4) ; R29.1 14.875,5.925 15.5,5.3 v1(17.6,5.3) ; v1@14.9,3.9 v1(15,4) ; R13.1 v1(15,4) ; U4.5 20.947,0.647 21.625,1.325 R22.2 ; R17.1 21.6,5.6 R16.1 ; v1(21.875,3.325) v1@21.9,3.3 ; C19.1 C19.1@21.9,4.225 ; v1@23.9,8.05 JP2.1
  Bottom Layer w0.25: R17.1 21.2,5.575 21.2,4.9 ; 21.625,1.325 21.5,1.325 21.225,1.6 20.3,1.6 19.6,2.3 19.6,2.8 19.1,3.3 19.1,3.8 19.575,4.275 19.575,4.7 19.775,4.9 21.2,4.9 ; v1(21.875,3.325) C19.1 21.875,4.9 21.2,4.9
VIN: C18.1 C21.1 R21.1 U3.1 U3.3 | length 8.8
  Top Layer w0.15: U3.1 21.147,0.647 21.4,0.9 21.4,2 ; U3.3 20.948,2.552 21.4,2.1 21.4,2 ; C18.1 R21.1 24.75,2.525 C21.1 23.775,3.475 22.9,2.6 22.2,2.6 21.6,2 21.4,2
VP: C1.1 C3.1 C5.1 R1.2 R19.1 U1.5 U2.18 | length 18.3
  Top Layer w0.15: C1.1 11.475,12.6 v1(11.8,12.6) ; C3.1 12.2,13 v1(11.8,12.6) ; U2.18 12.6,10.825 C5.1 12.175,10.925 11.8,11.3 v1(11.8,12.6)
  L2 w0.2: v1(7.6,6.225) 7.725,6.225 8.1,6.6 v1(8.1,11)
  Bottom Layer w0.15: R19.1 7.5,6.375 7.625,6.25 7.625,6.2 v1(7.6,6.225) ; U1.5 8.323,10.048 R1.2@9.25,10.975 ; v1(8.1,11) 9.225,11 R1.2@9.25,10.975 ; R1.2 R1.2@9.25,10.975 ; v1(11.8,12.6) 11.8,11.4 10.875,10.475 9.725,10.475 9.4,10.8 9.4,11.125 R1.2@9.25,10.975
pads on no net: FID1.0 FID1.1 FID2.0 FID2.1 JP1.3 JP2.3 JP3.3 JP4.3 JP5.3 JP6.3 JP7.3 MB1. MB2. U2. U5.1 Z1.2 Z1.3 Z1.14

## Polygon pours and split planes (outlines as drawn)
GND on L2 "P2" (solid, pour order 2): -3.9,-10 -3.9,24 33,24 33,-10
GND on P1 (split plane): 28.498,10 28.498,2.2 28.498,0.502 0.502,0.502 0.502,11.8 0.502,13.098 28.498,13.098
GND on P1 (split plane): 32.49,-9.49 -3.39,-9.49 -3.39,23.49 32.49,23.49

## Keep-outs
L2:
  lines w0.6: 0,0 29,0
  lines w0.8: 0,0 0,13.6 29,13.6 29,0

## Other copper
Top Layer:
  text "TOP LAYER" at -3,22.1 h1
  text "TOP" at 35.5,19.6 h1
  text "H18-002 rev 1.01 Alllocker-FS" at 1.8,-9.3 h1
L2:
  text "LAYER 2" at -2.9,19 h1
  text "LAYER 2" at 35.7,15.8 h1
Bottom Layer:
  text "BOTTOM" at -3,17.4 h1
  text "BOTTOM" at 35.7,13.6 h1
  text "GLEN" at 22.6,12.3 h0.9
  text "VK1XX" at 22.4,11.1 h0.9
P1 (plane layer: these items are gaps in the copper):
  lines w1: 0,0 29,0 29,2.2 29,10 29,13.5 28.9,13.6 24.3,13.6 0.2,13.6 0,13.4 0,11.8 0,0
  text "PLANE1 GND" at -3,20.6 h1
  text "PLANE 1" at 35.5,17.8 h1

## Silkscreen, mask and mechanical layers (free items; w line width, h text height)
Top Overlay:
  lines w0.1: 0,2.5 0,0 29,0 29,2.5 ; 0,8 0,13.6 29,13.6 29,8
Mechanical 5:
  lines w0.1: -3.9,-10 6.1,-10 33,-10 33,24 -3.9,24 -3.9,21 -3.9,-10
  text "H18-002-1.PCBDOC" at -2.7,29.1 h1
  text "Outline MECH 5" at -2.7,27.1 h1.4
  text "Top layer  .GTL / Plane 1  .GP1 / Mid Layer L2  .G1 / Bottom Layer .GBL /  / Outline .GM5 / Tab .GM6" at 35.1,0.2 h1
Mechanical 6:
  lines w2: -1,1.9 -1,-1 30,-1 30,1.9 ; -1,8.9 -1,14.6 30,14.6 30,8.8
  text "Tab route MECH 6" at -2.8,24.9 h1.4